# EAGLE board saturn_frontend_rv7 (EAGLE 7.7.0)

No outline drawn. Coordinates in mm, seen from the top.
Copper layers (1*16): Top 0.035mm / dielectric 1.5mm / Bottom 0.035mm
Design rules "project_1": minimum track width 10mil, minimum drill 24mil, track to track 8mil, track to pad 8mil, pad to pad 8mil, via to via 8mil, smd to smd 8mil, copper to edge 40mil, drill to drill 8mil, minimum pad ring 0mil, minimum via ring 0mil, stop-mask expansion 4mil, vias tented up to drill 0mil, thermal gap 10mil

## Footprints (pad centres in the part's own frame; a part is rotated, then mirrored left to right if it is on the bottom)
PAD_0PRIMARY = smd 1.6 x 4.648: 1 0,0
PAD_1PRIMARY = smd 0.711 x 0.711: 1 0,0
PAD_2PRIMARY = smd 0.508 x 0.508: 1 0,0
PAD_3PRIMARY = smd 0.305 x 0.356: 1 0,0
PAD_4PRIMARY = smd 0.457 x 0.457: 1 0,0
PAD_5PRIMARY = smd 0.508 x 0.508: 1 0,0

## Placement (x,y rotation side)
PAD4  [PAD_0PRIMARY]  12.38,73.5 0 bottom
PAD33  [PAD_1PRIMARY]  3.08,48.11 0 top
PAD3203  [PAD_2PRIMARY]  2.89,46.73 0 bottom
PAD3204  [PAD_2PRIMARY]  4.11,46.71 0 bottom
PAD3205  [PAD_2PRIMARY]  3.4,50.26 0 bottom
PAD3206  [PAD_2PRIMARY]  5.25,50.5 0 bottom
PAD3207  [PAD_2PRIMARY]  5.25,53.93 0 bottom
PAD3208  [PAD_2PRIMARY]  5.25,52.78 0 bottom
PAD3209  [PAD_2PRIMARY]  5.25,51.64 0 bottom
PAD3210  [PAD_2PRIMARY]  5.51,55.2 0 bottom
PAD3211  [PAD_2PRIMARY]  3.4,57.88 0 bottom
PAD3212  [PAD_2PRIMARY]  4.59,65.74 0 bottom
PAD3213  [PAD_2PRIMARY]  3.2,65.74 0 bottom
PAD3214  [PAD_2PRIMARY]  3.2,67.26 0 bottom
PAD3215  [PAD_2PRIMARY]  4.59,67.26 0 bottom
PAD3216  [PAD_2PRIMARY]  3.2,68.4 0 bottom
PAD3217  [PAD_2PRIMARY]  3.4,70.58 0 bottom
PAD3218  [PAD_2PRIMARY]  3.53,75.03 0 bottom
PAD3422  [PAD_2PRIMARY]  7.79,46.71 0 bottom
PAD3423  [PAD_2PRIMARY]  5.89,46.71 0 bottom
PAD3424  [PAD_2PRIMARY]  7.18,49 0 bottom
PAD3425  [PAD_2PRIMARY]  8.96,49 0 bottom
PAD3426  [PAD_2PRIMARY]  8.48,47.72 0 bottom
PAD3427  [PAD_2PRIMARY]  5.76,49.35 0 bottom
PAD3428  [PAD_2PRIMARY]  7.18,51.28 0 bottom
PAD3429  [PAD_2PRIMARY]  8.96,51.28 0 bottom
PAD3430  [PAD_2PRIMARY]  6.78,53.54 0 bottom
PAD3431  [PAD_2PRIMARY]  7.64,53.57 0 bottom
PAD3432  [PAD_2PRIMARY]  6.78,52.4 0 bottom
PAD3433  [PAD_2PRIMARY]  6.9,54.56 0 bottom
PAD3434  [PAD_2PRIMARY]  8.56,54.56 0 bottom
PAD3435  [PAD_2PRIMARY]  8.05,56.21 0 bottom
PAD3436  [PAD_2PRIMARY]  6.52,56.08 0 bottom
PAD3437  [PAD_2PRIMARY]  8.48,57.88 0 bottom
PAD3438  [PAD_2PRIMARY]  5.94,62.96 0 bottom
PAD3439  [PAD_2PRIMARY]  8.66,65.1 0 bottom
PAD3440  [PAD_2PRIMARY]  8.66,66.63 0 bottom
PAD3441  [PAD_2PRIMARY]  7.51,67.13 0 bottom
PAD3442  [PAD_2PRIMARY]  6.12,67.26 0 bottom
PAD3443  [PAD_2PRIMARY]  7.39,65.48 0 bottom
PAD3444  [PAD_2PRIMARY]  5.99,65.74 0 bottom
PAD3445  [PAD_2PRIMARY]  7.08,71.72 0 bottom
PAD3446  [PAD_2PRIMARY]  7.08,73.5 0 bottom
PAD3447  [PAD_2PRIMARY]  5.94,73.12 0 bottom
PAD3448  [PAD_2PRIMARY]  7.08,75.03 0 bottom
PAD3668  [PAD_2PRIMARY]  11.1,46.71 0 bottom
PAD3669  [PAD_2PRIMARY]  9.57,46.71 0 bottom
PAD3670  [PAD_2PRIMARY]  11.63,48.62 0 bottom
PAD3671  [PAD_2PRIMARY]  12.39,48.62 0 bottom
PAD3672  [PAD_2PRIMARY]  10.49,48.87 0 bottom
PAD3673  [PAD_2PRIMARY]  12.39,51.54 0 bottom
PAD3674  [PAD_2PRIMARY]  10.49,51.41 0 bottom
PAD3675  [PAD_2PRIMARY]  11.63,51.54 0 bottom
PAD3676  [PAD_2PRIMARY]  10.69,53.57 0 bottom
PAD3677  [PAD_2PRIMARY]  12.09,56.85 0 bottom
PAD3678  [PAD_2PRIMARY]  11.86,55.96 0 bottom
PAD3679  [PAD_2PRIMARY]  11.48,54.94 0 bottom
PAD3680  [PAD_2PRIMARY]  9.44,56.21 0 bottom
PAD3681  [PAD_2PRIMARY]  9.83,54.56 0 bottom
PAD3682  [PAD_2PRIMARY]  10.46,56.85 0 bottom
PAD3683  [PAD_2PRIMARY]  10.56,58.62 0 bottom
PAD3684  [PAD_2PRIMARY]  10.44,57.86 0 bottom
PAD3685  [PAD_2PRIMARY]  9.93,64.09 0 bottom
PAD3686  [PAD_2PRIMARY]  11.62,61.86 0 bottom
PAD3687  [PAD_2PRIMARY]  10.71,62.43 0 bottom
PAD3688  [PAD_2PRIMARY]  10.71,61.29 0 bottom
PAD3689  [PAD_2PRIMARY]  12.49,61.29 0 bottom
PAD3690  [PAD_2PRIMARY]  12.49,62.43 0 bottom
PAD3691  [PAD_2PRIMARY]  9.93,63.14 0 bottom
PAD3692  [PAD_2PRIMARY]  11.83,65.86 0 bottom
PAD3693  [PAD_2PRIMARY]  11.58,65.1 0 bottom
PAD3694  [PAD_2PRIMARY]  10.44,66.75 0 bottom
PAD3695  [PAD_2PRIMARY]  11.83,66.88 0 bottom
PAD3696  [PAD_2PRIMARY]  9.93,65.1 0 bottom
PAD3697  [PAD_2PRIMARY]  11.83,68.02 0 bottom
PAD3698  [PAD_2PRIMARY]  11.83,69.04 0 bottom
PAD3699  [PAD_2PRIMARY]  11.83,70.05 0 bottom
PAD3700  [PAD_2PRIMARY]  11.15,73.5 0 bottom
PAD3701  [PAD_2PRIMARY]  11.15,71.72 0 bottom
PAD3702  [PAD_2PRIMARY]  9.62,71.72 0 bottom
PAD3703  [PAD_2PRIMARY]  9.62,73.5 0 bottom
PAD3704  [PAD_2PRIMARY]  11.15,75.03 0 bottom
PAD3705  [PAD_2PRIMARY]  9.62,75.03 0 bottom
PAD3766  [PAD_2PRIMARY]  12.75,46.71 0 bottom
PAD3767  [PAD_2PRIMARY]  14.27,46.71 0 bottom
PAD3768  [PAD_2PRIMARY]  15.77,46.71 0 bottom
PAD3769  [PAD_2PRIMARY]  14.8,48.62 0 bottom
PAD3770  [PAD_2PRIMARY]  15.82,48.62 0 bottom
PAD3771  [PAD_2PRIMARY]  13.53,48.74 0 bottom
PAD3772  [PAD_2PRIMARY]  13.56,47.72 0 bottom
PAD3773  [PAD_2PRIMARY]  14.8,51.54 0 bottom
PAD3774  [PAD_2PRIMARY]  13.53,51.41 0 bottom
PAD3775  [PAD_2PRIMARY]  15.82,51.54 0 bottom
PAD3778  [PAD_2PRIMARY]  13.41,57.33 0 bottom
PAD3784  [PAD_2PRIMARY]  13.33,63.24 0 bottom
PAD3785  [PAD_2PRIMARY]  13.36,65.86 0 bottom
PAD3786  [PAD_2PRIMARY]  13.36,66.88 0 bottom
PAD3787  [PAD_2PRIMARY]  13.28,64.43 0 bottom
PAD3788  [PAD_2PRIMARY]  13.36,70.05 0 bottom
PAD3789  [PAD_2PRIMARY]  13.36,69.04 0 bottom
PAD3790  [PAD_2PRIMARY]  13.36,68.02 0 bottom
PAD3791  [PAD_2PRIMARY]  15.59,73.5 0 bottom
PAD3792  [PAD_2PRIMARY]  15.59,71.72 0 bottom
PAD3793  [PAD_2PRIMARY]  14.07,71.72 0 bottom
PAD3794  [PAD_2PRIMARY]  14.07,73.5 0 bottom
PAD3795  [PAD_2PRIMARY]  15.59,75.03 0 bottom
PAD3796  [PAD_2PRIMARY]  14.07,75.03 0 bottom
PAD3843  [PAD_2PRIMARY]  16.71,46.91 0 bottom
PAD3854  [PAD_2PRIMARY]  16.71,48.51 0 bottom
PAD3855  [PAD_2PRIMARY]  16.71,47.71 0 bottom
PAD3871  [PAD_2PRIMARY]  16.1,62.96 0 bottom
PAD3872  [PAD_2PRIMARY]  17.61,62.06 0 bottom
PAD3873  [PAD_2PRIMARY]  18.93,62.06 0 bottom
PAD3874  [PAD_2PRIMARY]  18.64,65.5 0 bottom
PAD3875  [PAD_2PRIMARY]  16.1,68.04 0 bottom
PAD3876  [PAD_2PRIMARY]  18.64,70.58 0 bottom
PAD3877  [PAD_2PRIMARY]  18.13,73.5 0 bottom
PAD3878  [PAD_2PRIMARY]  18.13,71.72 0 bottom
PAD3879  [PAD_2PRIMARY]  18.13,75.03 0 bottom
PAD3963  [PAD_2PRIMARY]  21.18,62.96 0 bottom
PAD3964  [PAD_2PRIMARY]  21.18,68.04 0 bottom
PAD3965  [PAD_2PRIMARY]  21.56,75.03 0 bottom
PAD5872  [PAD_3PRIMARY]  16.73,46.22 0 bottom
PAD5873  [PAD_3PRIMARY]  16.73,45.66 0 bottom
PAD7072  [PAD_4PRIMARY]  3.08,48.11 0 bottom
PAD7935  [PAD_5PRIMARY]  18.27,62.06 0 bottom
PAD8113  [PAD_0PRIMARY]  8.35,73.43 0 bottom
PAD8114  [PAD_0PRIMARY]  16.84,73.43 0 bottom

## Library data of the parts
PAD4 PAD33 PAD3203-PAD3218 PAD3422-PAD3448 PAD3668-PAD3705 PAD3766-PAD3775 PAD3778 PAD3784-PAD3796 PAD3843 PAD3854 PAD3855 PAD3871-PAD3879 PAD3963-PAD3965 PAD5872 PAD5873 PAD7072 PAD7935 PAD8113 PAD8114 = project_1